# Altium PCB uz_per_mw_vfd_interface.PcbDoc
Units mm, origin at the board's own origin, x right, y up, seen from the top; angles counter-clockwise.
Board outline 100 x 160 mm, 4 copper layers (Top Layer, Layer 1, Layer 2, Bottom Layer), stack 0.98 mm thick; 16 components, 71 nets, 151 pads, 0 vias.
Unrouted connection lines stored in the file: 127.
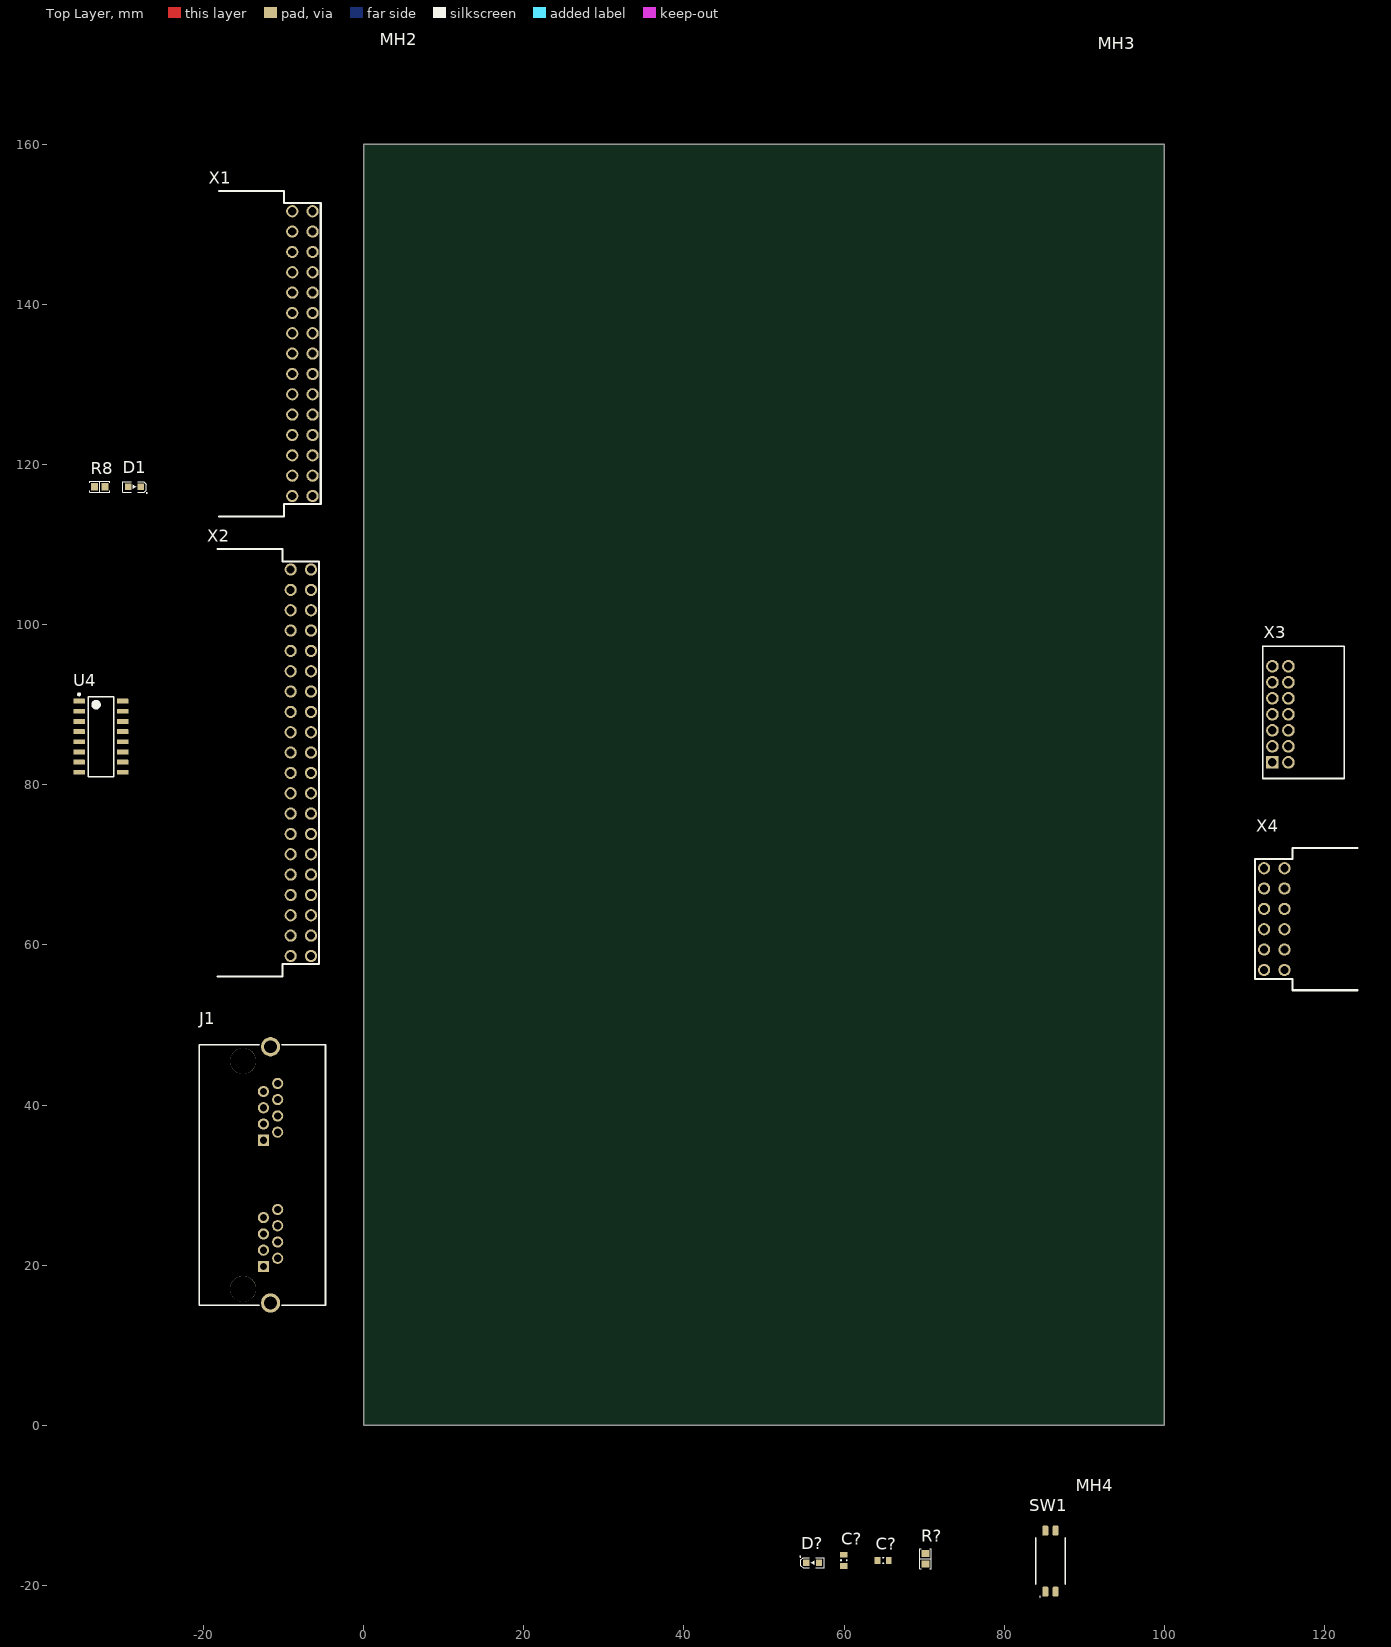
[diagram p0: Top Layer view]
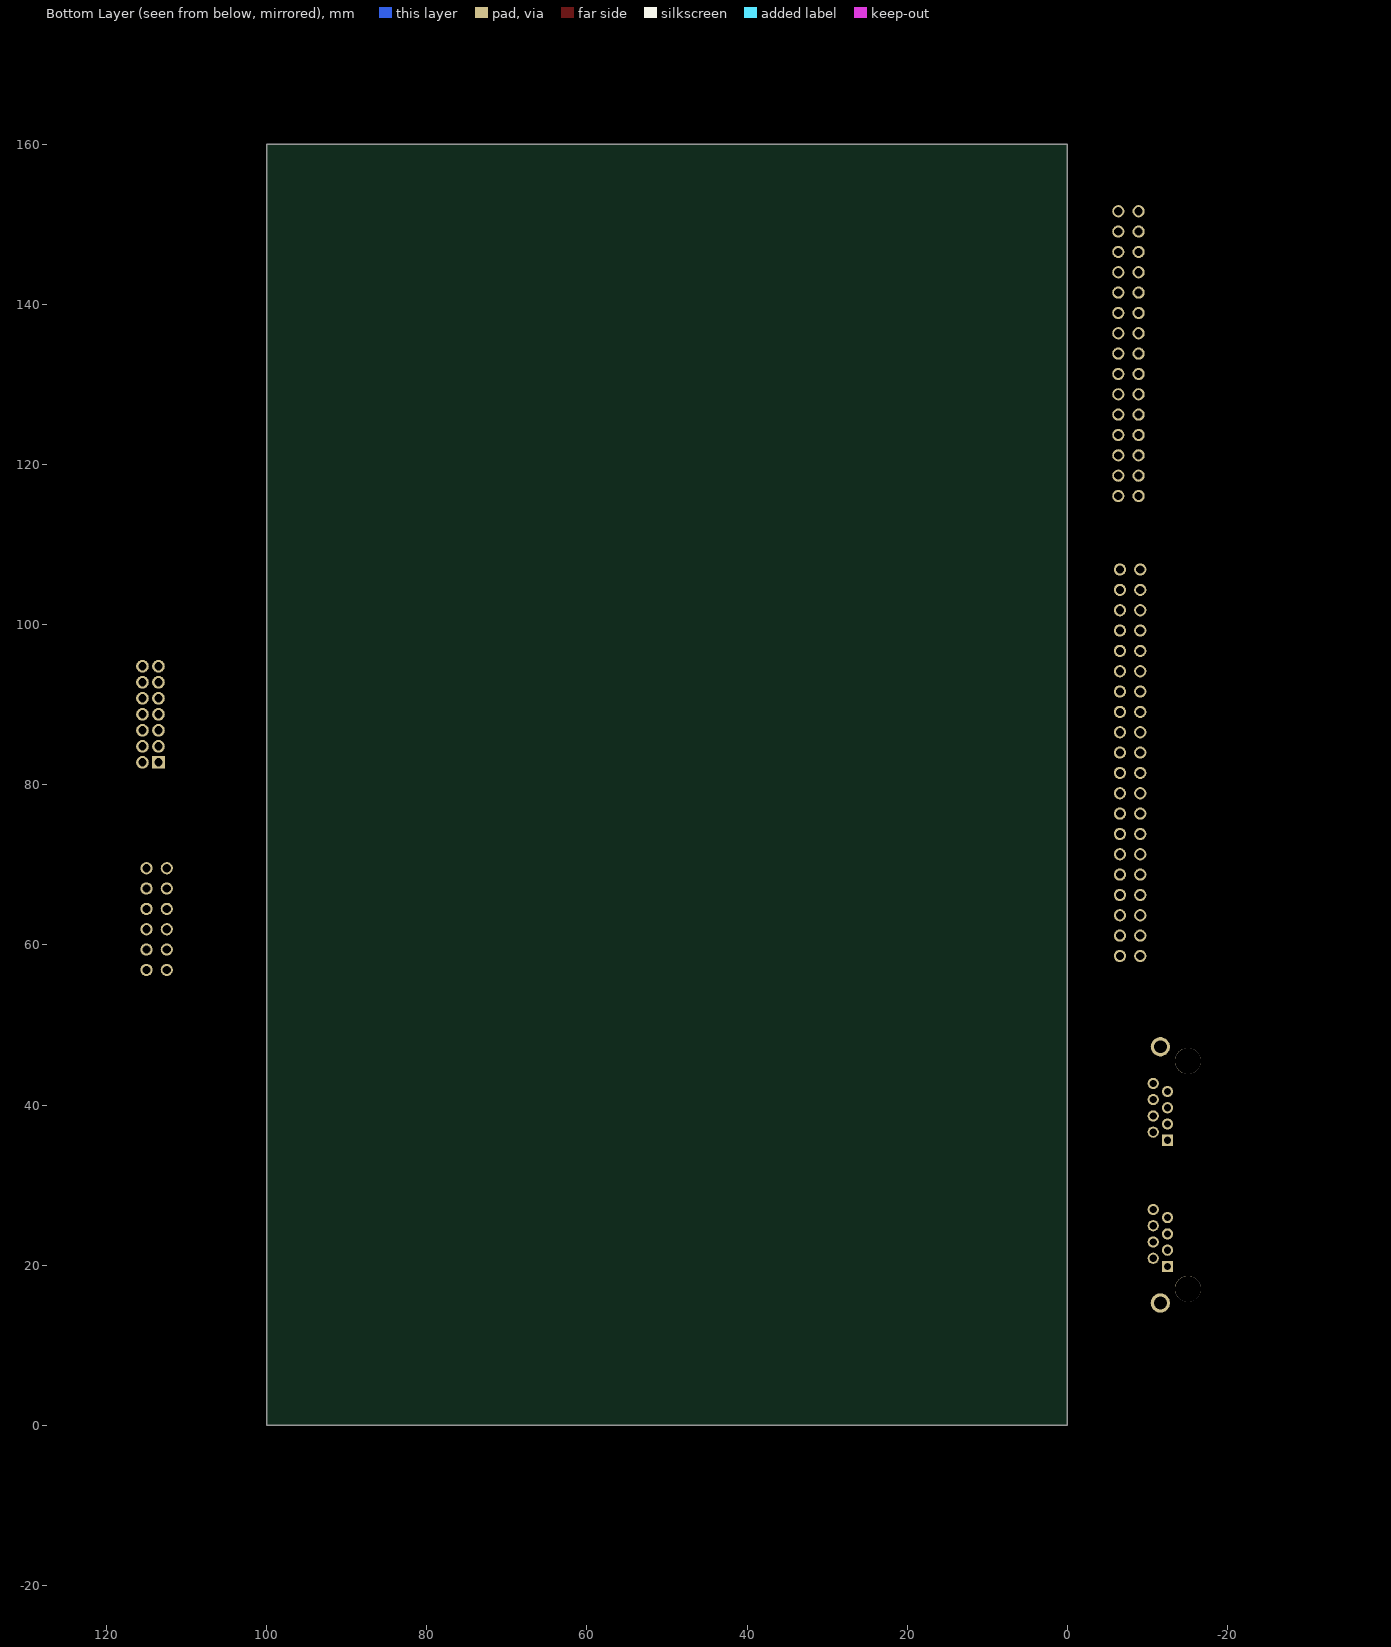
[diagram p1: Bottom Layer view, seen from below]

## Layer stack, top to bottom
Top Solder: solder mask 0.0102, Solder Resist, Dk 3.5
Top Layer: signal copper 0.035
Dielectric 2: prepreg 0.115, FR-4, Dk 4.4
Dielectric 4: prepreg 0.115, FR-4, Dk 4.4
Layer 1: signal copper 0.035
Dielectric 1: core 0.38, Core-036, Dk 4.4
Layer 2: signal copper 0.035
Dielectric 5: prepreg 0.115, FR-4, Dk 4.4
Dielectric 3: prepreg 0.115, FR-4, Dk 4.4
Bottom Layer: signal copper 0.035
Bottom Solder: solder mask 0.0102, Solder Resist, Dk 3.5

## Board outline
0,0 100,0 100,160 0,160

## Design rules (kind name [scope] priority, off if disabled: settings)
AssemblyTestPointUsage [InNetClass('3V3_SingleEnded') or InNetClass('5V_SingleEnded') or InNetClass('15V_SingleEnded') or InNetClass('DifferentialSignals')] p1:
BoardOutlineClearance [All] p1: gap=0.5 ignorepadtopadclearanceinfootprint=FALSE except(0: Arc-SplitContinuation Track-SplitContinuation SMDPad-SplitContinuation THPad-SplitContinuation Via-SplitContinuation Fill-SplitContinuation Poly-SplitContinuation Region-SplitContinuation Text-SplitContinuation)
Clearance Clearance_Differential [InNetClass('DifferentialSignals')] p1: gap=0.1 ignorepadtopadclearanceinfootprint=TRUE except(0: Arc-Hole Track-Hole SMDPad-Hole THPad-Hole Via-Hole Fill-Hole Poly-Hole Region-Hole Text-Hole; 0.3: SMDPad-Via; 0.4: THPad-Via)
Clearance Clearance_Power [InNetClass('Power')] p2: gap=0.1 ignorepadtopadclearanceinfootprint=TRUE except(0: Arc-Hole Track-Hole SMDPad-Hole THPad-Hole Via-Hole Fill-Hole Poly-Hole Region-Hole Text-Hole; 0.15: Via-Poly; 0.2: Track-Poly; 0.25: THPad-Poly; 0.3: Fill-Poly Poly-Region; 0.5: Poly-Poly)
Clearance [All] p3: gap=0.1 ignorepadtopadclearanceinfootprint=TRUE except(0: Arc-Hole Track-Hole SMDPad-Hole THPad-Hole Via-Hole Fill-Hole Poly-Hole Region-Hole Text-Hole; 0.4: SMDPad-Via THPad-Via; 0.5: Poly-Poly)
ComponentClearance [All] p1: gap=0.1 collisioncheckmode=3 verticalgap=0.1 showdistances=FALSE
DiffPairsRouting [InNetClass('DifferentialSignals')] p1: maxlimit=0.25 minlimit=0.127 mostfreqgap=0.25 toplayer_maxgap=0.127 toplayer_prefgap=0.127 toplayer_minwidth=0.285 toplayer_maxwidth=0.285 toplayer_prefwidth=0.285 midlayer1_minwidth=0.069 midlayer1_maxwidth=0.15 midlayer1_prefwidth=0.15 midlayer2_mingap=0.165 midlayer2_minwidth=0.1 midlayer2_maxwidth=0.15 midlayer2_prefwidth=0.15 bottomlayer_maxgap=0.127 bottomlayer_prefgap=0.127 bottomlayer_minwidth=0.285 bottomlayer_maxwidth=0.285 bottomlayer_prefwidth=0.285 impedanceprofiledriven=TRUE impedanceprofileid={5F7DE71B-7B0B-4CDE-8AE7-8AD61221F3A5} impedanceprofilevalue=100.000000 maxuncoupledlength=12.7
FanoutControl Fanout_Power [InNetClass('Power') or InNet('ENABLE')] p1: bgadir=Out bgaviamode=Centered fanoutstyle=Auto fanoutdirection=None viagrid=0.025
FanoutControl Fanout_RS422 [InNetClass('DifferentialSignals')] p2: bgadir=Out bgaviamode=Closest fanoutstyle=Rows fanoutdirection=OutOnly viagrid=0.025
FanoutControl Fanout_BGA [IsBGA] p3 off: bgadir=Out bgaviamode=Centered fanoutstyle=Auto fanoutdirection=Alternating viagrid=0.025 // Fanout_BGA (Default Rule)
FanoutControl Fanout_LCC [IsLCC] p4 off: bgadir=Out bgaviamode=Centered fanoutstyle=Auto fanoutdirection=Alternating viagrid=0.025 // Fanout_LCC (Default Rule)
FanoutControl Fanout_SOIC [IsSOIC] p5 off: bgadir=Out bgaviamode=Centered fanoutstyle=Auto fanoutdirection=Alternating viagrid=0.025 // Fanout_SOIC (Default Rule)
FanoutControl Fanout_Small [(CompPinCount < 5)] p6 off: bgadir=Out bgaviamode=Centered fanoutstyle=Auto fanoutdirection=OutThenIn viagrid=0.025 // Fanout_Small (Default Rule)
FanoutControl Fanout_Default [All] p7: bgadir=NE bgaviamode=Closest fanoutstyle=Rows fanoutdirection=InOnly viagrid=0.025 // Fanout_Default (Default Rule)
Height [All] p1: minheight=0 maxheight=50 prefheight=12.7
HoleSize [All] p1: absolutevalues=TRUE maxlimit=4 minlimit=0.025 maxpercent=80.000 minpercent=20.000
PolygonConnect PolygonConnect_Therm [HoleSize > 2.6] p1: connectstyle=Direct reliefconductorwidth=0.254 reliefentries=4 polygonreliefangle="90 Angle" airgapwidth=0.254
PolygonConnect PolygonConnect_via [InPadClass('pad') or IsVia] p2: connectstyle=Direct reliefconductorwidth=0.254 reliefentries=4 polygonreliefangle="90 Angle" airgapwidth=0.254
PolygonConnect [All] p3: connectstyle=Relief reliefconductorwidth=0.3 reliefentries=4 polygonreliefangle="90 Angle" airgapwidth=0.25
RoutingLayers RoutingLayers_3V3Signals [InNetClass('3V3_SingleEnded')] p1 off: top layer_v5=TRUE mid layer 1_v5=TRUE mid layer 2_v5=TRUE bottom layer_v5=TRUE
RoutingLayers RoutingLayers_SingleEnded [InNetClass('15V_SingleEnded') or InNetClass('3V3_SingleEnded') or InNetClass('5V_SingleEnded')] p2 off: top layer_v5=TRUE mid layer 1_v5=TRUE mid layer 2_v5=TRUE bottom layer_v5=TRUE
RoutingLayers RoutingLayers_Differential [InNetClass('DifferentialSignals')] p3 off: top layer_v5=TRUE mid layer 1_v5=TRUE mid layer 2_v5=TRUE bottom layer_v5=FALSE
RoutingLayers [All] p4: top layer_v5=TRUE mid layer 1_v5=TRUE mid layer 2_v5=TRUE bottom layer_v5=TRUE
RoutingVias [All] p1: holewidth=0.3 width=0.5 viastyle="Through Hole" minholewidth=0.2 minwidth=0.4 maxholewidth=0.5 maxwidth=1
SolderMaskExpansion [All] p1: expansion=0.102 istentingtop=FALSE
SupplyNets "Schematic Supply Nets_4" [InNet('3V3')] p1: voltage=0.000
SupplyNets "Schematic Supply Nets_1" [InNet('5V')] p2: voltage=0.000
SupplyNets "Schematic Supply Nets_7" [InNet('15V')] p3: voltage=0.000
SupplyNets "Schematic Supply Nets_3" [InNet('VIN')] p4: voltage=0.000
SupplyNets "Schematic Supply Nets" [InNet('GND')] p5: voltage=0.000
UnRoutedNet UnRoutedNet_Signals [InNetClass('15V_SingleEnded') or InNetClass('3V3_SingleEnded') or InNetClass('5V_SingleEnded') or InNetClass('DifferentialSignals')] p1: checkbadconnections=TRUE
UnRoutedNet [All] p2: checkbadconnections=TRUE
Width Width_Power [InNetClass('Power')] p1: maxlimit=10 minlimit=0.2 preferedwidth=0.3 minimp=50.000000 maximp=50.000000 favimp=50.000000
Width [All] p2: maxlimit=10 minlimit=0.1 preferedwidth=0.3 midlayer1_prefwidth=0.15 midlayer2_prefwidth=0.15 minimp=50.000000 maximp=50.000000 favimp=50.000000
18 further rules are at their usual default settings.

## Classes and differential pairs
component class AnalogSignals: D1 D? J1 MH2 MH3 MH4 R8 SW1 U4 X1 X2 X3 X4

## Components (designator, comment, footprint, x,y, rotation, side; value= is the part's Value field where it differs from the comment)
C? "1 nF" C_0603 64.879,-16.853 r0 top
C? "0.1 µF" C_0603 59.979,-16.853 r90 top
D1 "150060BS84000" WL-SMCW_0603 -28.6,117.2 r180 top
D? "150060BS84000" WL-SMCW_0603 56.079,-17.153 r0 top
J1 "RJHSE538002" RJHSE-5380-02 -15.04,45.506 r270 top
MH2 "Mounting Hole" MH_3.4 3.5,169.9 r90 top
MH3 "Mounting Hole" MH_3.4 93.1,169.4 r90 top
MH4 "Mounting Hole" MH_3.4 90.4,-10.7 r90 top
R8 "24k9" "RES 0603_1608" -32.95,117.2 r180 top
R? "3k" "RES 0603_1608" 70.179,-16.653 r90 top
SW1 "218-2LPSTR" 2182LPSTR 85.779,-16.953 r0 top
U4 "DS26C31TMX/NOPB" TI_D-R-PDSO-G16_N -32.8,86 r0 top
X1 "IPL1-115-01-L-D-RA-K" IPL1-115-01-XX-D-RA -18.552,133.84 r90 top
X2 "IPL1-120-01-L-D-RA-K" IPL1-120-01-XX-D-RA -18.752,82.75 r90 top
X3 "DF11-14DP-2DS(24)" DF11-14DP-2DS(24) 113.5,82.8 r270 top
X4 "IPL1-106-01-L-D-RA-K" IPL1-106-01-L-D-RA-K 124.652,63.23 r270 top

## Footprints (in the part's own frame and the unit in brackets; to place one, negate y for a bottom-side part, rotate by r counter-clockwise, add the part's x,y. Pads: shape width x height; smd on the part's side, far side on the other; paste and mask are expansions set on the pad)
2182LPSTR [mm]
  rrect50% 0.76x1.27 smd: 1(-0.635,-3.81) 2(0.635,-3.81) 3(0.635,3.81) 4(-0.635,3.81)
  silkscreen extent -1.86,-4.5 1.86,2.9, body extent -1.86,-4.22 1.86,4.22, height 2.5
C_0603 [mm] "Chip Capacitor, Body 1.6x0.8mm, Height 1.0mm, IPC High Density"
  rect 0.7x0.9 smd: 1(-0.7,0) 2(0.7,0)
  silkscreen extent -0.05,-0.35 0.05,0.35, body extent -0.87,-0.47 0.88,0.48, height 1
DF11-14DP-2DS(24) [mm]
  rect 1.575x1.575 hole 1.05: 1(0,0)
  round 1.575 hole 1.05: 2(0,2) 3(-2,0) 4(-2,2) 5(-4,0) 6(-4,2) 7(-6,0) 8(-6,2) 9(-8,0) 10(-8,2) 11(-10,0) 12(-10,2) 13(-12,0) 14(-12,2)
  silkscreen extent -14.5,-1.22 2.01,8.98, body extent -14,-0.3 2,8.67, height 5.3
IPL1-106-01-L-D-RA-K [mil]
  round 60 hole 40 mask+3: 1(-250,-380) 2(-150,-380) 3(-50,-380) 4(50,-380) 5(150,-380) 6(250,-380) 7(-250,-480) 8(-150,-480) 9(-50,-480) 10(50,-480) 11(150,-480) 12(250,-480)
  silkscreen extent -350,-525 350,-20, body extent -330,-492 330,0, height 310
IPL1-115-01-XX-D-RA [mil]
  round 60 hole 40 mask+3: 1(-700,-380) 2(-600,-380) 3(-500,-380) 4(-400,-380) 5(-300,-380) 6(-200,-380) 7(-100,-380) 8(0,-380) 9(100,-380) 10(200,-380) 11(300,-380) 12(400,-380) 13(500,-380) 14(600,-380) 15(700,-380) 16(-700,-480) 17(-600,-480) 18(-500,-480) 19(-400,-480) 20(-300,-480) 21(-200,-480) 22(-100,-480) 23(0,-480) 24(100,-480) 25(200,-480) 26(300,-480) 27(400,-480) 28(500,-480) 29(600,-480) 30(700,-480)
  silkscreen extent -800,-520 800,-20, body extent -780,-492 780,0, height 315
IPL1-120-01-XX-D-RA [mil]
  round 60 hole 40 mask+3: 1(-950,-380) 2(-850,-380) 3(-750,-380) 4(-650,-380) 5(-550,-380) 6(-450,-380) 7(-350,-380) 8(-250,-380) 9(-150,-380) 10(-50,-380) 11(50,-380) 12(150,-380) 13(250,-380) 14(350,-380) 15(450,-380) 16(550,-380) 17(650,-380) 18(750,-380) 19(850,-380) 20(950,-380) 21(-950,-480) 22(-850,-480) 23(-750,-480) 24(-650,-480) 25(-550,-480) 26(-450,-480) 27(-350,-480) 28(-250,-480) 29(-150,-480) 30(-50,-480) 31(50,-480) 32(150,-480) 33(250,-480) 34(350,-480) 35(450,-480) 36(550,-480) 37(650,-480) 38(750,-480) 39(850,-480) 40(950,-480)
  silkscreen extent -1050,-520 1050,-20, body extent -1030,-492 1030,0, height 315
MH_3.4 [mm]
  round 3.1 hole 3.4 unplated: 1(0,0)
"RES 0603_1608" [mm] "Chip Resistor, 2-Leads, Body 1.60x0.80mm, IPC Medium Density"
  rect 0.85x0.95 smd: 1(-0.65,0) 2(0.65,0)
  silkscreen extent -1.27,-0.7 1.27,0.7, body extent -0.8,-0.4 0.8,0.4, height 0.45
RJHSE-5380-02 [mm] "Modular Jack Horizontal Shielded Dual Port 8P8C Tab Up"
  rect 1.4x1.4 hole 0.9: A1(9.906,2.54) B1(25.654,2.54)
  round 1.4 hole 0.9: A2(8.89,4.318) A3(7.874,2.54) A4(6.858,4.318) A5(5.842,2.54) A6(4.826,4.318) A7(3.81,2.54) A8(2.794,4.318) B2(24.638,4.318) B3(23.622,2.54) B4(22.606,4.318) B5(21.59,2.54) B6(20.574,4.318) B7(19.558,2.54) B8(18.542,4.318)
  round 3.25 hole 3.25 unplated: MH1(0,0) MH2(28.448,0)
  round 2.4 hole 1.6: S1(-1.778,3.429) S2(30.226,3.429)
  silkscreen extent -2.03,-5.46 30.48,10.29, body extent -3.5,-5.41 31.95,10.29, height 15.06
TI_D-R-PDSO-G16_N [mm] "SOIC, 16-Leads, Body 10x4mm, Pitch 1.27mm, IPC Medium Density"
  rrect17% 1.45x0.6 smd: 1(-2.725,4.445) 2(-2.725,3.175) 3(-2.725,1.905) 4(-2.725,0.635) 5(-2.725,-0.635) 6(-2.725,-1.905) 7(-2.725,-3.175) 8(-2.725,-4.445) 9(2.725,-4.445) 10(2.725,-3.175) 11(2.725,-1.905) 12(2.725,-0.635) 13(2.725,0.635) 14(2.725,1.905) 15(2.725,3.175) 16(2.725,4.445)
  silkscreen extent -2.85,-5 1.6,5.42, body extent -3,-4.95 3,4.95, height 1.59
WL-SMCW_0603 [mm] "SMD Mono-color Chip LED, body 1.6x0.8mm"
  rect 0.8x0.8 smd: 1(-0.8,0) 2(0.8,0)
  silkscreen extent -1.59,-0.65 1.45,0.83, body extent -0.8,-0.4 0.8,0.4, height 0.7

## Part data
C?: library part CC0603JRNPO9BN102, "Capacitor 0603, 50 VDC, 1 nF, NP0", Device Package=0603, LCSC Part Number=C106246, Manufacturer=YAGEO, Operating Temperature="-55 - 125°C", TOLERANCE="5 %", Voltage Rating="50 VDC", Component Type="Capacitor 0603", ComponentLink1Description=Datasheet, ComponentLink1URL=https://datasheet.lcsc.com/lcsc/1811021411_YAGEO-CC0603JRNPO9BN102_C106246.pdf, Created from=AGeiger, Created On="30.08.2022 11:46:28", Last Updated="30.08.2022 11:46:28", Live Cycle Status=1, Manufacturer Part Number=CC0603JRNPO9BN102, Mounting Type=SMD, PartID=104, Series=NP0, Supplier 1=LCSC, Supplier Part Number 1=C106246, Type=Capacitor
C?: library part C0603X104K5RAC7411, "Capacitor 0603, 50 VDC, 0.1 µF, X7R", Device Package=0603, LCSC Part Number=C14663, Manufacturer=KEMET, Operating Temperature="-55 - 125°C", Supplier Part Number 1=80-C0603X104K5R7411, TOLERANCE="10 %", Voltage Rating="50 VDC", Component Type="Capacitor 0603", ComponentLink1Description=Datasheet, ComponentLink1URL=https://www.mouser.de/datasheet/2/212/1/KEM_C1013_X7R_FT_CAP_SMD-1103280.pdf, Created from=MGremer, Created On="20.12.2020 13:54:13", Last Updated="04.03.2021 09:24:28", Live Cycle Status=1, Manufacturer Part Number=C0603X104K5RAC7411, Mounting Type=SMD, PartID=3, Series="SMD Comm X7R Flex", Stock number="Labor SMD Container", Supplier 1=Mouser, Supplier 2=LCSC, Supplier Part Number 2=C14663, Type=Capacitor
D1: "WL-SMCW SMD Mono-color Chip LED Waterclear Blue", Color=blue, Device Package=0603, Forward Current I_f="20 mA", Forward Voltage U_f="3.2 V", Manufacturer="Wuerth Elektronik", Nominal Power="78 mW", Operating Temperature="-40 - 85 °C", Supplier Part Number 1=710-150060BS84000, Component Type="LED Diode", ComponentLink1Description=Datasheet, ComponentLink1URL=https://www.mouser.de/datasheet/2/445/150060BS84000-1838909.pdf, Created from=MGremer, Created On="08.12.2020 10:19:38", Last Updated="03.03.2021 09:59:51", Light Intensity="560 mcd", Live Cycle Status=1, Manufacturer Part Number=150060BS84000, Mounting Type=SMD, PartID=1, Stock number="not stored", Supplier 1=Mouser, Supplier 2=Farnell, Supplier 3=Digi-Key, Supplier Part Number 2=3408611, Supplier Part Number 3=732-150060BS84000CT-ND, Type=Standard, Wavelength="470 nm"
D?: "WL-SMCW SMD Mono-color Chip LED Waterclear Blue", Color=blue, Device Package=0603, Forward Current I_f="20 mA", Forward Voltage U_f="3.2 V", LCSC Part Number=C5197644, Manufacturer="Wuerth Elektronik", Nominal Power="78 mW", Operating Temperature="-40 - 85 °C", Supplier Part Number 1=710-150060BS84000, Component Type="LED Diode", ComponentLink1Description=Datasheet, ComponentLink1URL=https://www.mouser.de/datasheet/2/445/150060BS84000-1838909.pdf, Created from=MGremer, Created On="08.12.2020 10:19:38", Last Updated="21.02.2024 14:46:49", Light Intensity="560 mcd", Live Cycle Status=1, Manufacturer Part Number=150060BS84000, Mounting Type=SMD, PartID=1, Stock number="not stored", Supplier 1=Mouser, Supplier 2=Farnell, Supplier 3=Digi-Key, Supplier Part Number 2=3408611, Supplier Part Number 3=732-150060BS84000CT-ND, Type=Standard, Wavelength="470 nm"
J1: "CAT5, RJ45 Connector, 1x2", Device Package=RJ45, Manufacturer=Amphenol, Supplier Part Number 1=1860605, Component Type="RJ45 Connector", ComponentLink1Description=Datasheet, ComponentLink1URL=https://www.farnell.com/cad/2360382.pdf, Created from=MGremer, Created On="22.02.2021 16:43:38", Last Updated="22.02.2021 16:43:38", Live Cycle Status=1, Manufacturer Part Number=RJHSE538002, Mounting Type=THT, PartID=4, Series=RJHSE, Stock number="not stored", Supplier 1=Farnell, Type="RJ45 Connector"
MH2 MH3 MH4: Device Package=-, Component Type="Mounting Hole", ComponentLink1Description=Datasheet, Created from=MHlatky, Created On="26.01.2021 09:19:51", Last Updated="21.03.2022 23:05:12", Live Cycle Status=1, Manufacturer="Mounting Hole", Manufacturer Part Number="Mounting Hole", PartID=16, Stock number="not stored", Supplier 1="Mounting Hole", Supplier Part Number 1="Mounting Hole", Type="Mounting Hole"
R8: library part CRCW060324K9FKEA, "SMD resistor 1%", Device Package=0603, Manufacturer=Vishay, Supplier Part Number 1=71-CRCW0603-24.9K-E3, TOLERANCE=1%, Component Type="SMD resistor", ComponentLink1Description=Datasheet, ComponentLink1URL=https://www.mouser.de/datasheet/2/427/dcrcwe3-1762152.pdf, Created from=MGremer, Created On="14.12.2020 16:17:14", Last Updated="02.03.2021 14:07:32", Live Cycle Status=1, Manufacturer Part Number=CRCW060324K9FKEA, Mounting Type=SMD, PartID=157, Stock number="not stored", Supplier 1=Mouser, Type=Resistor
R?: library part RK73B1JTTD302J, "SMD resistor E24 series", Device Package=0603, Manufacturer="KOA Speer", Supplier Part Number 1=660-RK73B1JTTD302J, TOLERANCE=5%, Component Type="SMD resistor", ComponentLink1Description=Datasheet, ComponentLink1URL=https://www.mouser.de/datasheet/2/219/RK73B-1825463.pdf, Created from=MGremer, Created On="14.12.2020 16:17:14", Last Updated="02.03.2021 14:07:32", Live Cycle Status=1, Manufacturer Part Number=RK73B1JTTD302J, Mounting Type=SMD, PartID=85, Stock number="Labor SMD Container", Supplier 1=Mouser, Type=Resistor
SW1: "DIP Switches/SIP Switches SPST 2 switch sections", Device Package=SMD-4P,3.7x5.8mm, LCSC Part Number=C2961921, Manufacturer="CTS Electronic Components", Operating Temperature="-55 to +85 °C", Supplier Part Number 1=774-2182LPSTR, Component Type="DIP Switch", ComponentLink1Description=Datasheet, ComponentLink1URL=https://www.mouser.de/datasheet/2/96/CTS_Switches_DIP_218_Series_Datasheet-1144897.pdf, Created from=AGeiger, Created On="23.08.2024 11:42:29", Last Updated="23.08.2024 11:42:29", Live Cycle Status=1, Manufacturer Part Number=218-2LPSTR, Mounting Type=SMD, PartID=44, Supplier 1=Mouser, Supplier 2=LCSC, Supplier Part Number 2=C2961921, Type="Dip Switch 2p"
U4: "CMOS Quad Tri-State Differential Line Drivers, 16-pin Narrow SOIC, Pb-Free", Device Package=SOIC, LCSC Part Number=C132085, Manufacturer="Texas Instruments", Operating Temperature="-40°C - 85°C", Supplier Part Number 1=DS26C31TMX/NOPBCT-ND, Component Type="RS422 Driver", ComponentLink1Description=Datasheet, ComponentLink1URL=http://www.ti.com/general/docs/lit/getliterature.tsp?genericPartNumber=DS26C31T&fileType=pdf, Created from="T. Wendt", Created On="01.03.2021 10:08:45", Last Updated="04.03.2021 09:04:43", Live Cycle Status=1, Manufacturer Part Number=DS26C31TMX/NOPB, Minimum Order=1, Mounting Type=SMD, PartID=1, Series=DS26C31, Stock number="not stored", Supplier 1=Digi-Key, Supplier 2=Mouser, Supplier 3=LCSC, Supplier Part Number 2=926-DS26C31TMX/NOPB, Supplier Part Number 3=C132085, Type=Standard
X1: "Terminal Assembly, Double Row, Right Angle, Thru-Hole, 2.54 mm x 2.54 mm Pitch, 30 Pins", Device Package=Connector, Manufacturer=SAMTEC, Component Type="Samtec Connector", ComponentLink1Description=Homepage, ComponentLink1URL=https://www.samtec.com/products/ipl1, Created from=TWendt, Created On="12.02.2021 15:31:18", Last Updated="15.02.2021 10:07:42", Live Cycle Status=1, Manufacturer Part Number=IPL1-115-01-L-D-RA-K, Number of Positions=30, Number of Rows=2, PartID=34, Stock number="not stored", Supplier 1=SAMTEC, Supplier Part Number 1=IPL1-115-01-L-D-RA-K, Type=Connector
X2: "Terminal Assembly, Double Row, Right Angle, Thru-Hole, 2.54 mm x 2.54 mm Pitch, 40 Pins", Device Package=Connector, Manufacturer=SAMTEC, Component Type="Samtec Connector", ComponentLink1Description=Homepage, ComponentLink1URL=https://www.samtec.com/products/ipl1, Created from=TWendt, Created On="12.02.2021 15:26:11", Last Updated="15.02.2021 10:07:42", Live Cycle Status=1, Manufacturer Part Number=IPL1-120-01-L-D-RA-K, Mounting Type=THT, Number of Positions=40, Number of Rows=2, PartID=33, Stock number="not stored", Supplier 1=SAMTEC, Supplier Part Number 1=IPL1-120-01-L-D-RA-K, Type=Connector
X3: "Sockel & Kabelgehäuse 2MM R/A PCB HEADER 14P DR THRU-HOLE TIN", LCSC Part Number=C5440913, Manufacturer="Hirose Connector", Operating Temperature="-30 °C to +85 °C", Supplier Part Number 1=798-DF11-14DP-2DS24, ComponentLink1Description=Datasheet, ComponentLink1URL=https://www.hirose.com/product/download/?distributor=all&type=2d&lang=en&num=DF11-14DP-2DS(24), Created from=FRosner, Created On="29.05.2026 08:10:33", Last Updated="29.05.2026 08:10:33", Manufacturer Part Number=DF11-14DP-2DS(24), Mounting Type=THT, PartID=74, Series=DF11, Supplier 1=Mouser, Supplier 2=LCSC, Supplier Part Number 2=C5440913
X4: "2.54 mm Double Row Terminal Assembly (right angle)", Device Package=Connector, Manufacturer=SAMTEC, Component Type="Samtec Connector", ComponentLink1Description=Homepage, ComponentLink1URL=https://www.samtec.com/products/ipl1, Created from=MGremer, Created On="30.11.2020 10:28:12", Last Updated="15.02.2021 09:17:39", Live Cycle Status=1, Manufacturer Part Number=IPL1-106-01-L-D-RA-K, Mounting Type=THT, Number of Positions=6, Number of Rows=2, PartID=12, Stock number="not stored", Supplier 1=SAMTEC, Supplier Part Number 1=IPL1-106-01-L-D-RA-K, Type=Connector

## Nets (pads, with @x,y where several pads share a name; then routed paths per layer and width w, separated by ;. In a path a pad name is that pad's centre, name@x,y a point inside that pad or via, vN(x,y) a via of type N, cw(c..) or ccw(c..) an arc to the next point about the centre after c; other vN are vias at no path point)
3V3: X2.10
5V: C?.2 R?.2 X2.20
15V: X1.10
DIG_IO_N0: X1.17
DIG_IO_N1: X1.18
DIG_IO_N2: X1.19
DIG_IO_N3: X1.20
DIG_IO_N4: X1.21
DIG_IO_N5: X1.22
DIG_IO_N6: X1.23
DIG_IO_N7: X1.24
DIG_IO_N8: X1.26
DIG_IO_N9: X1.27
DIG_IO_N10: X1.28
DIG_IO_N11: X1.29
DIG_IO_N12: X1.30
DIG_IO_N13: X2.22
DIG_IO_N14: X2.23
DIG_IO_N15: X2.24
DIG_IO_N16: X2.25
DIG_IO_N17: X2.26
DIG_IO_N18: X2.27
DIG_IO_N19: X2.28
DIG_IO_N20: U4.3 X2.29
DIG_IO_N21: U4.5 X2.31
DIG_IO_N22: U4.11 X2.32
DIG_IO_N23: U4.13 X2.33
DIG_IO_N24: X2.34
DIG_IO_N25: X2.35
DIG_IO_N26: X2.36
DIG_IO_N27: X2.37
DIG_IO_N28: X2.38
DIG_IO_N29: X2.39
DIG_IO_P0: X1.2
DIG_IO_P1: X1.3
DIG_IO_P2: X1.4
DIG_IO_P3: X1.5
DIG_IO_P4: X1.6
DIG_IO_P5: X1.7
DIG_IO_P6: X1.8
DIG_IO_P7: X1.9
DIG_IO_P8: X1.11
DIG_IO_P9: X1.12
DIG_IO_P10: X1.13
DIG_IO_P11: X1.14
DIG_IO_P12: X1.15
DIG_IO_P13: X2.2
DIG_IO_P14: X2.3
DIG_IO_P15: X2.4
DIG_IO_P16: X2.5
DIG_IO_P17: X2.6
DIG_IO_P18: X2.7
DIG_IO_P19: X2.8
DIG_IO_P20: U4.2 X2.9
DIG_IO_P21: U4.6 X2.11
DIG_IO_P22: U4.10 X2.12
DIG_IO_P23: U4.14 X2.13
DIG_IO_P24: X2.14
DIG_IO_P25: X2.15
DIG_IO_P26: X2.16
DIG_IO_P27: X2.17
DIG_IO_P28: X2.18
DIG_IO_P29: X2.19
FAULT: U4.1
GND: C?.1 D1.1 D?.1 X1.16 X1.25 X2.21 X2.30 X2.40
NetD1_2: D1.2 R8.1
NetD?_2: D?.2 R?.1
RES_IN_0: U4.7
RES_IN_1: U4.9
RES_IN_2: U4.15
VIN: R8.2 X1.1 X2.1
pads on no net: J1.A1 J1.A2 J1.A3 J1.A4 J1.A5 J1.A6 J1.A7 J1.A8 J1.B1 J1.B2 J1.B3 J1.B4 J1.B5 J1.B6 J1.B7 J1.B8 J1.MH1 J1.MH2 J1.S1 J1.S2 MH2.1 MH3.1 MH4.1 SW1.1 SW1.2 SW1.3 SW1.4 U4.4 U4.8 U4.12 U4.16 X3.1 X3.2 X3.3 X3.4 X3.5 X3.6 X3.7 X3.8 X3.9 X3.10 X3.11 X3.12 X3.13 X3.14 X4.1 X4.2 X4.3 X4.4 X4.5 X4.6 X4.7 X4.8 X4.9 X4.10 X4.11 X4.12

## Silkscreen, mask and mechanical layers (free items; w line width, h text height)
Mechanical 1:
  lines w0.1: 0,0 100,0 100,160 0,160 0,0 ; 156.157,127.4 157.157,127.4 157.157,159.4 156.157,159.4 156.157,127.4
  lines w0.254: 127.8,126 147.8,126 147.8,128.2 127.8,128.2 127.8,126